# EAGLE board Amplificador no inversor (EAGLE 9.7.0)

Size 102.66 x 36.24 mm. Coordinates in mm from the lower left corner, seen from the top.
Outline: 0,0 102.66,0 102.66,36.24 0,36.24 0,0
Copper layers (1*16): Top 0.035mm / dielectric 1.5mm / Bottom 0.035mm
Design rules "default": minimum track width 6mil, minimum drill 0.35mm, track to track 6mil, track to pad 6mil, pad to pad 6mil, via to via 6mil, smd to smd 6mil, copper to edge 40mil, drill to drill 6mil, minimum pad ring 10mil, minimum via ring 8mil, stop-mask expansion 4mil, vias tented up to drill 0mil, thermal gap 10mil

## Footprints (pad centres in the part's own frame; a part is rotated, then mirrored left to right if it is on the bottom)
BATTERY-GENERIC = drill 1.118 pad 3.15 octagon: + 2.54,0; - -2.54,0
RESAD1016W63L850D250B = drill 0.83 pad 1.43: 1 -5.08,0; 2 5.08,0
HA-06-SM065 = drill 1 pad 1.676: 1 -2.54,-2.54; 2 0,2.54; 3 2.54,-2.54
DIP826W53P254L959H508Q8B = drill 0.786 pad 1.386: 1 -4.13,3.81; 2 -4.13,1.27; 3 -4.13,-1.27; 4 -4.13,-3.81; 5 4.13,-3.81; 6 4.13,-1.27; 7 4.13,1.27; 8 4.13,3.81

## Placement (x,y rotation side)
P1  BATTERYGENERIC  [BATTERY-GENERIC]  8.26,14.24 180 top
R1  1k  [RESAD1016W63L850D250B]  59.91,6.33 0 top
R2  1k  [RESAD1016W63L850D250B]  42.13,6.33 0 top
RPOT1  10k  [HA-06-SM065]  95.61,29.19 0 top
U1  OPAMP_DIP  [DIP826W53P254L959H508Q8B]  58.65,20.3 0 top

## Library data of the parts
P1 R1 R2 RPOT1 U1 = Tinkercad

## Nets
P1+: P1.+ RPOT1.3 U1.7
P1-: P1.- R2.1 RPOT1.1 U1.4
U1_+IN: RPOT1.2 U1.3
U1_-IN: R1.1 R2.2 U1.2
U1_OUT: R1.2 U1.6

## Tracks (layer width: path | path; a pad name or v marks a point on that pad's centre or on a via)
P1+  (2 unrouted)
P1-  (3 unrouted)
U1_+IN  (1 unrouted)
U1_-IN  (2 unrouted)
U1_OUT  (1 unrouted)